# Altium PCB osc_evo.PcbDoc (part 5 of 5)
Units mm, origin at the board's own origin, x right, y up, seen from the top; angles counter-clockwise.
Board outline 145 x 85 mm, 4 copper layers (Top Layer, Mid-Layer 1, Mid-Layer 2, Bottom Layer); 114 components, 170 nets, 648 pads, 625 vias.
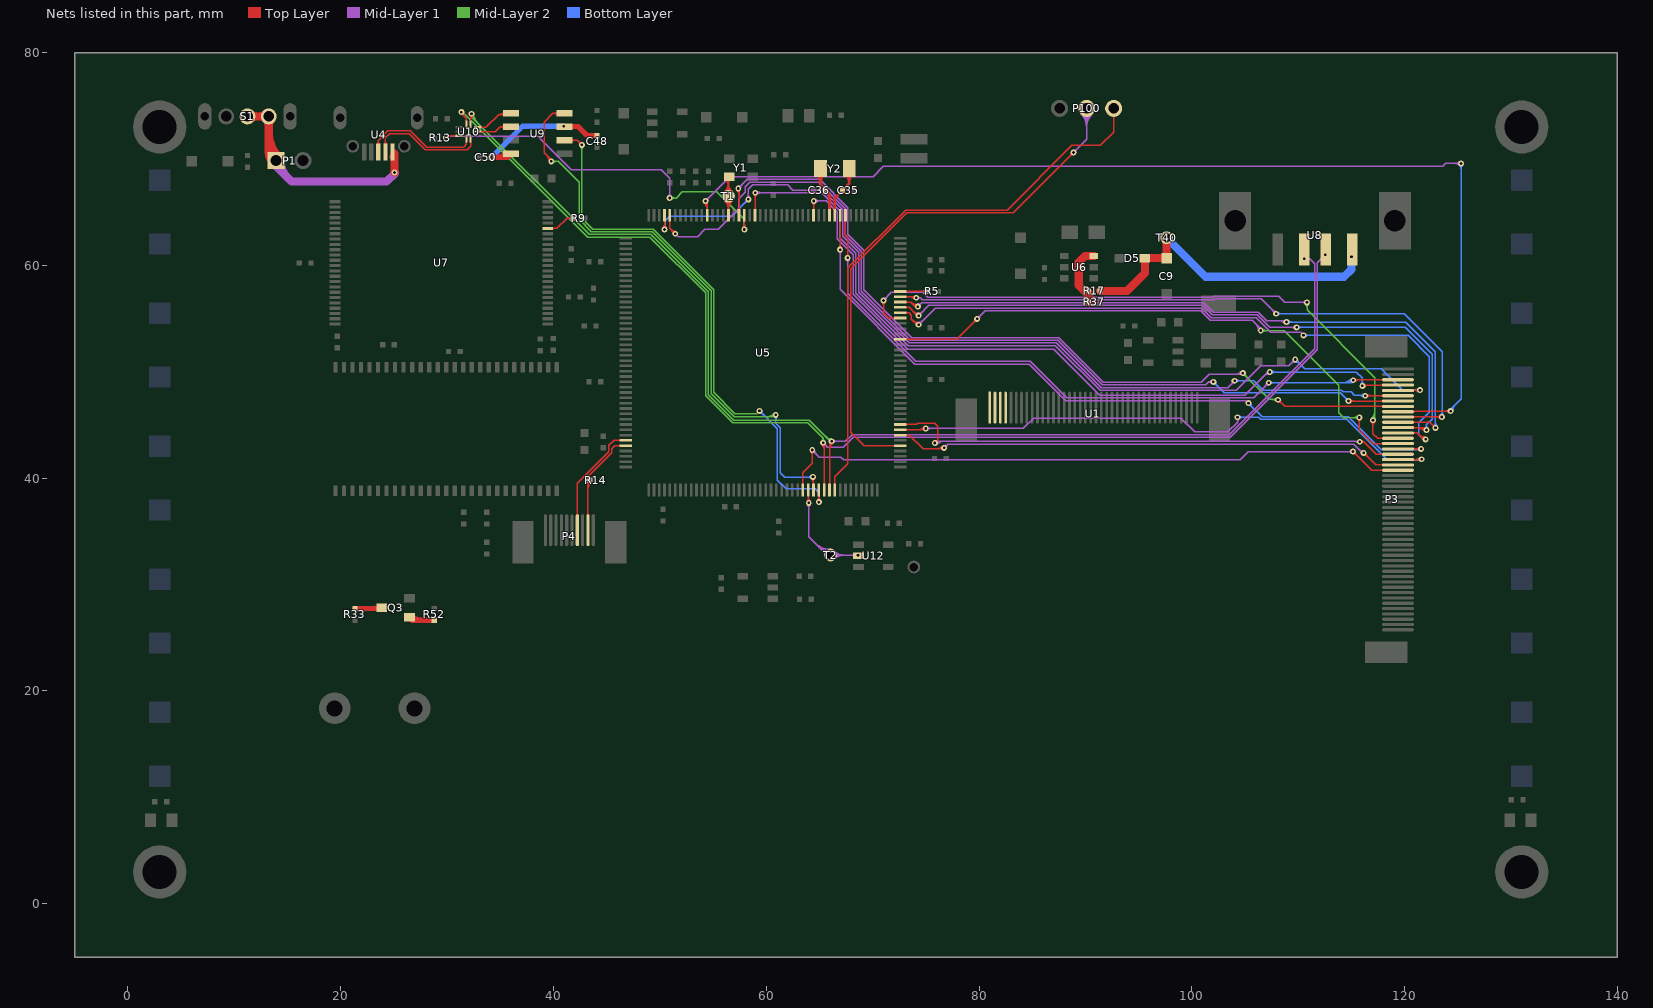
[diagram p7: the nets of this part, all layers, seen from the top]

## Via types
v1: diameter 0.55, hole 0.25, Top Layer to Bottom Layer, tented both sides, 463 vias
v2: diameter 0.55, hole 0.25, Top Layer to Bottom Layer, 156 vias
v3: diameter 0.45, hole 0.2, Top Layer to Bottom Layer, tented both sides, 4 vias
v4: diameter 1.5, hole 1.5, Top Layer to Bottom Layer, tented both sides, 2 vias

## Nets (pads, with @x,y where several pads share a name; then routed paths per layer and width w, separated by ;. In a path a pad name is that pad's centre, name@x,y a point inside that pad or via, vN(x,y) a via of type N, cw(c..) or ccw(c..) an arc to the next point about the centre after c; other vN are vias at no path point) (continued)
NetP3_31: P3.31 U5.118 | length 64.4
  Top Layer w0.127: U5.118@63.407,39.419 ccw(c63.302,39.524) 63.45,39.524 ccw(c63.598,39.524) U5.118@63.493,39.419 ; U5.118@63.45,38.9 63.45,40.525 64.325,41.4 v1(64.325,42.65) ; v1@64.175,42.5 cw(c63.814,42.139) 64.325,42.139 cw(c64.836,42.139) v1@64.475,42.5 ; v1@115.15,42.289 cw(c115.15,41.778) 115.511,42.139 cw(c115.872,42.5) v1@115.361,42.5 ; v1(115.15,42.5) 116.9,40.75 P3.31@119.375,40.75 ; P3.31@117.964,40.689 ccw(c117.816,40.541) 117.816,40.75 ccw(c117.816,40.959) P3.31@117.964,40.811
  Mid-Layer 1 w0.127: v1@64.325,42.439 cw(c64.325,41.928) 64.686,42.289 cw(c65.047,42.65) v1@64.536,42.65 ; v1(64.325,42.65) 65,41.975 67.025,41.975 67.283,41.717 104.542,41.717 105.3,42.475 115.125,42.475 v1(115.15,42.5) ; 114.579,42.475 ccw(c114.579,43.071) v1@115,42.65 ; 114.7,42.475 cw(c114.7,42.05) v1@115,42.35
NetP3_32: P3.32 U5.139 | length 52.6
  Top Layer w0.127: U5.139@72.6,44.05 73.45,44.05 74.75,42.75 v1@76.55,42.75 ; U5.139@73.118,44.007 cw(c73.223,43.902) 73.223,44.05 cw(c73.223,44.199) U5.139@73.118,44.094 ; 75.973,42.75 ccw(c75.973,43.602) v1@76.575,43 ; 76.28,42.75 ccw(c76.28,43.295) v1@76.665,42.91 ; 76.456,42.75 cw(c76.456,42.581) v1@76.575,42.7 ; v1@116.15,42.164 cw(c116.15,41.653) 116.511,42.014 cw(c116.872,42.375) v1@116.361,42.375 ; v1(116.15,42.375) 117.275,41.25 P3.32@119.375,41.25 ; P3.32@117.964,41.189 ccw(c117.816,41.041) 117.816,41.25 ccw(c117.816,41.459) P3.32@117.964,41.311
  Mid-Layer 1 w0.127: v1(76.725,42.85) 77.05,43.175 ; v1@76.741,43.061 ccw(c76.772,43.453) 77.05,43.175 ; v1@76.936,42.866 cw(c77.328,42.897) 77.05,43.175 ; 115.533,42.842 ccw(c116.15,43.459) v1@116.15,42.586 ; 115.75,42.625 ccw(c116.15,43.026) v1@116.15,42.459 ; 115.895,42.48 cw(c115.79,42.375) v1@115.939,42.375 ; v1(116.15,42.375) 116,42.375 115.2,43.175 77.05,43.175
NetP3_33: P3.33 U5.140 | length 60.4
  Top Layer w0.127: U5.140@72.6,44.55 74.875,44.55 v1(75,44.675) ; U5.140@73.118,44.507 cw(c73.223,44.402) 73.223,44.55 cw(c73.223,44.699) U5.140@73.118,44.594 ; 74.188,44.55 ccw(c74.188,45.487) v1@74.85,44.825 ; 74.494,44.55 ccw(c74.494,45.181) v1@74.94,44.735 ; P3.33@119.375,41.75 121.575,41.75 v1(121.6,41.775) ; P3.33@120.786,41.689 cw(c120.934,41.541) 120.934,41.75 cw(c120.934,41.959) P3.33@120.786,41.811 ; 121.029,41.75 ccw(c121.029,42.346) v1@121.45,41.925 ; 121.15,41.75 cw(c121.15,41.325) v1@121.45,41.625
  Mid-Layer 1 w0.127: v1(75,44.675) 84.175,44.675 85.15,45.65 98.975,45.65 100.267,44.358 103.39,44.358 104.3,45.268 ; v1@75.15,44.525 cw(c75.511,44.164) 75.511,44.675 cw(c75.511,45.186) v1@75.15,44.825 ; v1@104.163,45.564 cw(c103.913,45.268) 104.3,45.268 ; v1(104.3,45.725) 104.3,45.268 ; v1@104.437,45.564 ccw(c104.687,45.268) 104.3,45.268
  Bottom Layer w0.127: v1(104.3,45.725) 106.291,45.725 106.495,45.521 114.579,45.521 118.35,41.75 121.575,41.75 v1(121.6,41.775) ; v1@104.45,45.575 cw(c104.811,45.214) 104.811,45.725 cw(c104.811,46.236) v1@104.45,45.875 ; 121.029,41.75 ccw(c121.029,42.346) v1@121.45,41.925 ; 121.15,41.75 cw(c121.15,41.325) v1@121.45,41.625
NetP3_34: P3.34 U5.141 | length 52.9
  Top Layer w0.127: U5.141@72.6,45.05 74.16,45.05 74.25,45.141 75.859,45.141 76.125,44.875 76.125,43.55 ; U5.141@73.118,45.007 cw(c73.223,44.902) 73.223,45.05 cw(c73.223,45.199) U5.141@73.118,45.094 ; v1@75.863,43.288 76.125,43.55 ; v1@75.917,43.501 ccw(c75.981,43.694) 76.125,43.55 ; v1@76.058,43.337 cw(c76.295,43.38) 76.125,43.55 ; v1(115.781,43.427) 116.173,43.427 ; v1@115.957,43.311 cw(c116.173,43.169) 116.173,43.427 ; v1@115.957,43.543 ccw(c116.173,43.685) 116.173,43.427 ; P3.34@117.964,42.189 ccw(c117.816,42.041) 117.816,42.25 ccw(c117.816,42.459) P3.34@117.964,42.311 ; P3.34@119.375,42.25 117.35,42.25 116.173,43.427
  Mid-Layer 1 w0.127: v1@75.82,43.33 cw(c76.147,43.003) 76.147,43.466 ; v1(75.85,43.3) 76.016,43.466 115.419,43.466 115.509,43.375 115.75,43.375 115.781,43.406 v1(115.781,43.427) ; v1@75.91,43.24 cw(c76.454,42.696) 76.454,43.466 ; v1@76,43.15 cw(c76.76,42.39) 76.76,43.466
NetP3_35: P3.35 U5.8 | length 74.9
  Top Layer w0.127: v1@66.8,61.625 ccw(c66.439,61.986) 66.95,61.986 ccw(c67.461,61.986) v1@67.1,61.625 ; U5.8@66.907,64.182 cw(c66.802,64.077) 66.95,64.077 cw(c67.098,64.077) U5.8@66.993,64.182 ; v1(66.95,61.475) U5.8@66.95,64.7 ; P3.35@119.375,42.75 v1(121.55,42.75) ; P3.35@120.786,42.689 cw(c120.934,42.541) 120.934,42.75 cw(c120.934,42.959) P3.35@120.786,42.811 ; v1@121.4,42.6 ccw(c121.039,42.239) 121.039,42.75 ccw(c121.039,43.261) v1@121.4,42.9
  Mid-Layer 1 w0.127: v1@66.8,61.325 cw(c66.439,60.964) 66.95,60.964 cw(c67.461,60.964) v1@67.1,61.325 ; v1(66.95,61.475) 66.95,57.738 73.963,50.725 84.7,50.725 88.129,47.296 105.079,47.296 v1(105.325,47.05)
  Bottom Layer w0.127: v1@105.325,46.839 cw(c105.325,46.328) 105.686,46.689 cw(c106.047,47.05) v1@105.536,47.05 ; v1(105.325,47.05) 106.6,45.775 114.684,45.775 117.78,42.68 121.48,42.68 v1(121.55,42.75) ; 120.869,42.68 ccw(c120.869,43.431) v1@121.4,42.9 ; 121.176,42.68 ccw(c121.176,43.124) v1@121.49,42.81 ; 121.209,42.68 cw(c121.209,42.409) v1@121.4,42.6
NetP3_36: P3.36 U5.157 | length 61.1
  Top Layer w0.127: U5.157@72.6,53.05 77.9,53.05 v1(79.825,54.975) ; U5.157@73.118,53.007 cw(c73.223,52.902) 73.223,53.05 cw(c73.223,53.198) U5.157@73.118,53.094 ; v1@79.614,54.975 cw(c79.103,54.975) 79.464,54.614 cw(c79.825,54.253) v1@79.825,54.764 ; v1@115.6,45.55 cw(c115.239,45.189) 115.75,45.189 cw(c116.261,45.189) v1@115.9,45.55 ; v1(115.75,45.7) 115.75,44.525 117.025,43.25 P3.36@119.375,43.25 ; P3.36@117.964,43.189 ccw(c117.816,43.041) 117.816,43.25 ccw(c117.816,43.459) P3.36@117.964,43.311
  Mid-Layer 1 w0.127: v1(79.825,54.975) 80.58,55.73 100.817,55.73 101.709,54.838 105.675,54.838 106.475,54.038 v1(106.475,53.875) ; v1@79.825,55.186 ccw(c79.825,55.697) 80.186,55.336 ccw(c80.547,54.975) v1@80.036,54.975 ; 105.999,54.514 cw(c105.359,53.875) v1@106.264,53.875 ; 106.215,54.298 cw(c105.793,53.875) v1@106.391,53.875
  Mid-Layer 2 w0.127: v1(106.475,53.875) 108.7,53.875 113.825,48.75 113.825,46.15 114.275,45.7 v1(115.75,45.7) ; v1@106.625,53.725 cw(c106.986,53.364) 106.986,53.875 cw(c106.986,54.386) v1@106.625,54.025 ; v1@115.6,45.55 ccw(c115.239,45.189) 115.239,45.7 ccw(c115.239,46.211) v1@115.6,45.85
NetP3_37: P3.37 U5.161 | length 67.6
  Top Layer w0.127: v1@70.875,56.55 cw(c70.454,56.129) 71.05,56.129 ; v1(71.025,56.7) 71,56.7 71.05,56.65 71.05,55.5 71.5,55.05 U5.161@72.6,55.05 ; 71.05,56.25 cw(c71.475,56.25) v1@71.175,56.55 ; U5.161@72.082,55.007 ccw(c71.977,54.902) 71.977,55.05 ccw(c71.977,55.198) U5.161@72.082,55.094 ; v1@116.875,45.3 cw(c116.514,44.939) 117.025,44.939 cw(c117.536,44.939) v1@117.175,45.3 ; v1(117.025,45.45) 117.025,44.175 117.45,43.75 P3.37@119.375,43.75 ; P3.37@117.964,43.689 ccw(c117.816,43.541) 117.816,43.75 ccw(c117.816,43.959) P3.37@117.964,43.811
  Mid-Layer 1 w0.127: v1(71.025,56.7) 71.775,57.45 74.725,57.45 75.175,57 101.957,57 102.052,57.095 108.155,57.095 108.725,56.525 v1(110.825,56.525) ; v1@71.025,56.911 ccw(c71.025,57.422) 71.386,57.061 ccw(c71.747,56.7) v1@71.236,56.7 ; v1@110.675,56.375 ccw(c110.314,56.014) 110.314,56.525 ccw(c110.314,57.036) v1@110.675,56.675
  Mid-Layer 2 w0.127: v1@110.675,56.375 cw(c110.314,56.014) 110.825,56.014 cw(c111.336,56.014) v1@110.975,56.375 ; v1(110.825,56.525) 110.825,55.825 117.2,49.45 117.2,45.625 v1(117.025,45.45) ; v1@116.875,45.6 ccw(c116.092,46.383) 117.2,46.383 ; v1@116.965,45.51 ccw(c116.399,46.076) 117.2,46.076 ; v1@117.055,45.42 ccw(c116.705,45.77) 117.2,45.77
NetP3_38: P3.38 U5.162 | length 70.9
  Top Layer w0.127: U5.162@72.6,55.55 73.425,55.55 73.65,55.325 73.65,54.95 74.175,54.425 v1(74.325,54.425) ; U5.162@73.118,55.507 cw(c73.223,55.402) 73.223,55.55 cw(c73.223,55.698) U5.162@73.118,55.594 ; 73.708,54.892 ccw(c74.325,55.509) v1@74.325,54.636 ; 73.925,54.675 ccw(c74.325,55.076) v1@74.325,54.509 ; 74.07,54.53 cw(c73.965,54.425) v1@74.114,54.425 ; P3.38@119.375,44.25 119.4,44.275 121.15,44.275 121.775,43.65 v1(121.975,43.65) ; P3.38@120.786,44.189 cw(c120.994,43.981) 120.994,44.275 ; P3.38@120.786,44.311 ccw(c120.873,44.398) 120.873,44.275 ; 121.273,44.152 ccw(c121.975,44.855) v1@121.975,43.861 ; 121.489,43.936 ccw(c121.975,44.421) v1@121.975,43.734 ; 121.706,43.719 ccw(c121.975,43.988) v1@121.975,43.607
  Mid-Layer 1 w0.127: v1(74.325,54.425) 75.884,55.984 100.923,55.984 101.815,55.092 106.04,55.092 107.441,53.691 110.234,53.691 v1(110.5,53.425) ; v1@74.325,54.636 ccw(c74.325,55.147) 74.686,54.786 ccw(c75.047,54.425) v1@74.536,54.425
  Bottom Layer w0.127: v1(110.5,53.425) 120.325,53.425 122.321,51.429 122.321,46.196 121.325,45.2 121.325,44.075 121.75,43.65 v1(121.975,43.65) ; v1@110.65,53.275 cw(c111.011,52.914) 111.011,53.425 cw(c111.011,53.936) v1@110.65,53.575 ; 121.325,44.075 ccw(c121.858,44.608) v1@121.949,43.86 ; 121.509,43.891 ccw(c121.898,44.279) v1@121.965,43.734 ; 121.693,43.707 ccw(c121.938,43.951) v1@121.98,43.608
NetP3_39: P3.39 U5.163 | length 70.5
  Top Layer w0.127: U5.163@72.6,56.05 73.45,56.05 74.075,55.425 ; U5.163@73.118,56.007 cw(c73.223,55.902) 73.223,56.05 cw(c73.223,56.198) U5.163@73.118,56.094 ; 73.793,55.707 ccw(c74.325,56.239) v1@74.325,55.486 ; 74.01,55.49 ccw(c74.325,55.805) v1@74.325,55.359 ; 74.035,55.465 cw(c73.844,55.275) v1@74.114,55.275 ; v1@74.116,55.304 ccw(c73.974,55.324) 74.075,55.425 ; v1@74.176,55.425 cw(c74.125,55.475) 74.075,55.425 ; v1(74.325,55.275) 74.325,55.35 74.225,55.45 74.2,55.425 74.075,55.425 ; P3.39@119.375,44.75 121.825,44.75 ; P3.39@120.786,44.689 cw(c120.934,44.541) 120.934,44.75 cw(c120.934,44.959) P3.39@120.786,44.811 ; 120.996,44.75 cw(c120.996,43.471) v1@121.9,44.375 ; 121.303,44.75 cw(c121.303,43.778) v1@121.99,44.465 ; 121.609,44.75 cw(c121.609,44.084) v1@122.08,44.555 ; v1@121.854,44.605 ccw(c121.731,44.656) 121.825,44.75 ; v1@121.97,44.721 cw(c121.919,44.844) 121.825,44.75 ; v1(122.05,44.525) 121.825,44.75
  Mid-Layer 1 w0.127: v1(74.325,55.275) 75.288,56.238 101.028,56.238 101.92,55.346 106.145,55.346 107.32,54.17 109.845,54.17 v1(109.85,54.175) ; v1@74.325,55.486 ccw(c74.325,55.997) 74.686,55.636 ccw(c75.047,55.275) v1@74.536,55.275 ; 109.328,54.17 ccw(c109.328,54.697) v1@109.7,54.325 ; 109.351,54.17 cw(c109.351,53.676) v1@109.7,54.025
  Bottom Layer w0.127: v1(109.85,54.175) 120.05,54.175 122.575,51.65 122.575,45.55 122.05,45.025 ; v1@110,54.025 cw(c110.361,53.664) 110.361,54.175 cw(c110.361,54.686) v1@110,54.325 ; v1@121.903,44.677 ccw(c121.565,45.025) 122.05,45.025 ; v1(122.05,44.525) 122.05,45.025 ; v1@122.197,44.677 cw(c122.535,45.025) 122.05,45.025
NetP3_40: P3.40 U5.164 | length 69.9
  Top Layer w0.127: U5.164@72.6,56.55 73.6,56.55 ; U5.164@73.118,56.507 cw(c73.223,56.402) 73.223,56.55 cw(c73.223,56.698) U5.164@73.118,56.593 ; 73.784,56.366 ccw(c74.173,56.754) v1@74.24,56.209 ; 73.968,56.182 ccw(c74.213,56.426) v1@74.255,56.083 ; v1@74.224,56.335 cw(c74.133,57.083) 73.6,56.55 ; v1(74.25,56.125) 74.15,56.025 74.125,56.025 73.6,56.55 ; P3.40@119.375,45.25 122.375,45.25 v1(122.9,44.725) ; P3.40@120.786,45.189 cw(c120.934,45.041) 120.934,45.25 cw(c120.934,45.459) P3.40@120.786,45.311 ; v1@122.689,44.725 ccw(c122.178,44.725) 122.539,45.086 ccw(c122.9,45.447) v1@122.9,44.936
  Mid-Layer 1 w0.127: v1(74.25,56.125) 74.617,56.492 101.133,56.492 102.025,55.6 106.25,55.6 107.063,54.787 108.788,54.787 v1(108.9,54.675) ; v1@74.25,56.336 ccw(c74.25,56.847) 74.611,56.486 ccw(c74.972,56.125) v1@74.461,56.125 ; 108.118,54.787 cw(c108.118,53.893) v1@108.75,54.525 ; 108.424,54.787 cw(c108.424,54.199) v1@108.84,54.615
  Bottom Layer w0.127: v1(108.9,54.675) 120.1,54.675 122.9,51.875 v1(122.9,44.725) ; v1@109.05,54.525 cw(c109.411,54.164) 109.411,54.675 cw(c109.411,55.186) v1@109.05,54.825 ; v1@122.75,44.875 ccw(c122.389,45.236) 122.9,45.236 ccw(c123.411,45.236) v1@123.05,44.875
NetP3_41: P3.41 U5.165 | length 68.9
  Top Layer w0.127: U5.165@72.6,57.05 73.975,57.05 74.1,56.925 v1(74.1,56.95) ; U5.165@73.118,57.007 cw(c73.223,56.902) 73.223,57.05 cw(c73.223,57.198) U5.165@73.118,57.093 ; 73.348,57.05 cw(c73.348,56.198) v1@73.95,56.8 ; 73.655,57.05 cw(c73.655,56.505) v1@74.04,56.89 ; 73.831,57.05 ccw(c73.831,57.219) v1@73.95,57.1 ; P3.41@119.375,45.75 v1(123.5,45.75) ; P3.41@120.786,45.689 cw(c120.934,45.541) 120.934,45.75 cw(c120.934,45.959) P3.41@120.786,45.811 ; v1@123.35,45.6 ccw(c122.989,45.239) 122.989,45.75 ccw(c122.989,46.261) v1@123.35,45.9
  Mid-Layer 1 w0.127: v1(74.1,56.95) 74.475,56.95 ; v1@74.281,56.841 cw(c74.475,56.723) 74.475,56.95 ; v1@74.281,57.059 ccw(c74.475,57.177) 74.475,56.95 ; v1@107.714,55.45 ccw(c107.203,55.45) 107.564,55.811 ccw(c107.925,56.172) v1@107.925,55.661 ; v1(107.925,55.45) 106.534,56.841 102.157,56.841 102.063,56.746 74.679,56.746 74.475,56.95
  Bottom Layer w0.127: v1(107.925,55.45) 119.975,55.45 123.525,51.9 v1@123.525,45.775 ; v1@108.075,55.3 cw(c108.436,54.939) 108.436,55.45 cw(c108.436,55.961) v1@108.075,55.6 ; v1@123.35,45.9 ccw(c122.929,46.321) 123.525,46.321 ; 123.525,46.2 ccw(c123.95,46.2) v1@123.65,45.9
NetP3_42: P3.42 U5.33 | length 109.2
  Top Layer w0.127: v1@54.15,65.9 cw(c53.427,65.177) U5.33@54.45,65.177 ; v1@54.24,65.99 cw(c53.734,65.484) 54.45,65.484 ; v1(54.3,66.05) 54.45,65.9 U5.33@54.45,64.7 ; v1@54.33,66.08 cw(c54.04,65.79) 54.45,65.79 ; U5.33@54.407,65.218 ccw(c54.302,65.323) 54.45,65.323 ccw(c54.599,65.323) U5.33@54.494,65.218 ; P3.42@119.375,46.25 119.425,46.3 v1(124.325,46.3) ; P3.42@120.786,46.189 cw(c121.055,45.92) 121.055,46.3 ; v1@124.175,46.15 ccw(c123.814,45.789) 123.814,46.3 ccw(c123.814,46.811) v1@124.175,46.45
  Mid-Layer 1 w0.127: v1(54.3,66.05) 56.587,68.337 70.053,68.337 71.02,69.304 123.6,69.304 123.871,69.575 v1(125.3,69.575) ; v1@54.3,66.261 ccw(c54.3,66.772) 54.661,66.411 ccw(c55.022,66.05) v1@54.511,66.05 ; v1@125.15,69.425 ccw(c124.789,69.064) 124.789,69.575 ccw(c124.789,70.086) v1@125.15,69.725
  Bottom Layer w0.127: v1(124.325,46.3) 124.325,46.475 125.3,47.45 v1(125.3,69.575) ; v1@124.409,46.3 cw(c125.036,46.3) 124.593,46.743 ; v1@124.536,46.3 cw(c125.47,46.3) 124.81,46.96 ; v1@125.15,69.425 cw(c124.789,69.064) 125.3,69.064 cw(c125.811,69.064) v1@125.45,69.425
NetP3_43: P3.43 U5.27 | length 84.4
  Top Layer w0.127: v1@57.228,67.079 cw(c56.693,66.543) 57.45,66.543 ; v1@57.318,67.169 cw(c56.999,66.85) 57.45,66.85 ; v1(57.378,67.228) 57.381,67.225 v1@57.45,67.225 ; U5.27@57.407,65.218 ccw(c57.302,65.323) 57.45,65.323 ccw(c57.598,65.323) U5.27@57.494,65.218 ; U5.27@57.45,64.7 v1@57.45,67.225 ; 57.45,66.892 cw(c57.714,66.892) v1@57.527,67.079 ; v1@108.1,47.164 cw(c108.1,46.653) 108.461,47.014 cw(c108.822,47.375) v1@108.311,47.375 ; v1(108.1,47.375) 108.725,46.75 P3.43@119.375,46.75 ; P3.43@117.964,46.689 ccw(c117.816,46.541) 117.816,46.75 ccw(c117.816,46.959) P3.43@117.964,46.811 ; v1@57.45,67.225 57.45,67.25 57.475,67.225 v1@57.45,67.225
  Mid-Layer 1 w0.127: v1(57.378,67.228) 58.233,68.083 65.029,68.083 67.687,65.425 67.687,62.931 69.183,61.435 69.183,57.685 73.656,53.212 87.491,53.212 91.691,49.012 100.887,49.012 101.65,49.775 104.7,49.775 v1(104.8,49.875) ; v1@57.378,67.44 ccw(c57.378,67.95) 57.739,67.589 ccw(c58.1,67.228) v1@57.589,67.228 ; 104.048,49.775 ccw(c104.048,50.627) v1@104.65,50.025 ; 104.355,49.775 ccw(c104.355,50.32) v1@104.74,49.935 ; 104.531,49.775 cw(c104.531,49.606) v1@104.65,49.725
  Mid-Layer 2 w0.127: v1@104.8,49.664 cw(c104.8,49.153) 105.161,49.514 cw(c105.522,49.875) v1@105.011,49.875 ; v1(104.8,49.875) 107.275,47.4 v1@108.1,47.4 ; 107.529,47.4 cw(c107.529,46.804) v1@107.95,47.225 ; 107.65,47.4 ccw(c107.65,47.825) v1@107.95,47.525
NetP3_44: P3.44 U5.40 | length 89.8
  Top Layer w0.127: U5.40@50.907,64.182 cw(c50.802,64.077) 50.95,64.077 cw(c51.099,64.077) U5.40@50.994,64.182 ; U5.40@50.95,64.7 50.95,63.475 v1(51.45,62.975) ; v1@51.239,62.975 ccw(c50.728,62.975) 51.089,63.336 ccw(c51.45,63.697) v1@51.45,63.186 ; v1(114.725,47.25) P3.44@119.375,47.25 ; v1@114.875,47.1 cw(c115.236,46.739) 115.236,47.25 cw(c115.236,47.761) v1@114.875,47.4 ; P3.44@117.964,47.189 ccw(c117.816,47.041) 117.816,47.25 ccw(c117.816,47.459) P3.44@117.964,47.311
  Mid-Layer 1 w0.127: v1(51.45,62.975) 51.725,62.7 53.55,62.7 54.225,63.375 55.475,63.375 57.4,65.3 57.4,66.25 58.025,66.875 58.025,67.4 58.454,67.829 64.924,67.829 67.433,65.32 67.433,62.826 68.929,61.33 68.929,57.58 73.551,52.958 87.385,52.958 91.585,48.758 101.3,48.758 101.592,49.05 ; v1@101.858,48.92 ccw(c101.592,48.713) 101.592,49.05 ; v1@101.858,49.18 cw(c101.592,49.387) 101.592,49.05 ; v1(102.025,49.05) 101.592,49.05
  Bottom Layer w0.127: v1@102.025,48.839 cw(c102.025,48.328) 102.386,48.689 cw(c102.747,49.05) v1@102.236,49.05 ; v1(102.025,49.05) 103.05,48.025 113.95,48.025 v1(114.725,47.25) ; v1@114.514,47.25 ccw(c114.003,47.25) 114.364,47.611 ccw(c114.725,47.972) v1@114.725,47.461
NetP3_45: P3.45 U5.41 | length 93.1
  Top Layer w0.127: v1@50.3,63.525 ccw(c49.939,63.886) 50.45,63.886 ccw(c50.961,63.886) v1@50.6,63.525 ; U5.41@50.407,64.182 cw(c50.302,64.077) 50.45,64.077 cw(c50.599,64.076) U5.41@50.494,64.182 ; v1(50.45,63.375) U5.41@50.45,64.7 ; v1@58.325,65.989 cw(c58.325,65.84) 58.43,65.945 ; v1(58.325,66.2) 58.325,66.05 58.45,65.925 ; v1(116.3,47.75) P3.45@119.375,47.75 ; v1@116.45,47.6 cw(c116.811,47.239) 116.811,47.75 cw(c116.811,48.261) v1@116.45,47.9 ; P3.45@117.964,47.689 ccw(c117.816,47.541) 117.816,47.75 ccw(c117.816,47.959) P3.45@117.964,47.811
  Mid-Layer 1 w0.127: v1@58.175,66.35 ccw(c57.814,66.711) 58.325,66.711 ccw(c58.836,66.711) v1@58.475,66.35 ; v1(58.325,66.2) 58.325,67.15 58.75,67.575 62.004,67.575 62.5,67.079 65.314,67.079 67.179,65.214 67.179,62.721 68.675,61.225 68.675,57.475 73.446,52.704 87.28,52.704 91.48,48.504 103.379,48.504 v1(104.025,49.15) ; v1@103.814,49.15 cw(c103.303,49.15) 103.664,48.789 cw(c104.025,48.428) v1@104.025,48.939
  Bottom Layer w0.127: v1@50.3,63.525 ccw(c49.939,63.886) 50.45,63.886 ccw(c50.961,63.886) v1@50.6,63.525 ; v1(50.45,63.375) 50.45,64.125 50.95,64.625 56.75,64.625 v1(58.325,66.2) ; v1@58.114,66.2 cw(c57.603,66.2) 57.964,65.839 cw(c58.325,65.478) v1@58.325,65.989 ; v1(104.025,49.15) 105.825,49.15 106.696,48.279 114.055,48.279 114.234,48.1 114.975,48.1 115.275,47.8 116.25,47.8 v1(116.3,47.75) ; v1@104.175,49 cw(c104.536,48.639) 104.536,49.15 cw(c104.536,49.661) v1@104.175,49.3 ; 115.669,47.8 cw(c115.669,47.119) v1@116.15,47.6 ; 115.91,47.8 ccw(c115.91,48.14) v1@116.15,47.9 ; 115.975,47.8 cw(c115.975,47.425) v1@116.24,47.69
NetP3_46: P3.46 U5.24 | length 85.8
  Top Layer w0.127: v1@58.825,66.675 cw(c58.525,66.375) 58.95,66.375 ; U5.24@58.907,65.218 ccw(c58.802,65.323) 58.95,65.323 ccw(c59.098,65.323) U5.24@58.994,65.218 ; U5.24@58.95,64.7 58.95,66.8 v1(58.975,66.825) ; 58.95,66.254 cw(c59.546,66.254) v1@59.125,66.675 ; P3.46@119.375,48.25 119.4,48.275 v1(121.45,48.275) ; P3.46@120.786,48.189 cw(c120.994,47.981) 120.994,48.275 ; P3.46@120.786,48.311 ccw(c120.873,48.398) 120.873,48.275 ; v1@121.3,48.125 ccw(c120.939,47.764) 120.939,48.275 ccw(c120.939,48.786) v1@121.3,48.425
  Mid-Layer 1 w0.127: v1(58.975,66.825) 65.209,66.825 66.925,65.109 66.925,62.616 68.421,61.12 68.421,57.37 73.341,52.45 87.175,52.45 91.375,48.25 104.175,48.25 106.475,50.55 109.125,50.55 v1(109.725,51.15) ; v1@59.125,66.675 cw(c59.486,66.314) 59.486,66.825 cw(c59.486,67.336) v1@59.125,66.975 ; v1@109.514,51.15 cw(c109.003,51.15) 109.364,50.789 cw(c109.725,50.428) v1@109.725,50.939
  Bottom Layer w0.127: v1@109.725,50.939 cw(c109.725,50.428) 110.086,50.789 cw(c110.447,51.15) v1@109.936,51.15 ; v1(109.725,51.15) 110.6,50.275 117.8,50.275 119.8,48.275 v1(121.45,48.275) ; v1@121.3,48.125 ccw(c120.939,47.764) 120.939,48.275 ccw(c120.939,48.786) v1@121.3,48.425
NetP3_47: P3.47 U5.13 | length 75.9
  Top Layer w0.127: v1@64.325,65.9 cw(c63.964,65.539) 64.475,65.539 cw(c64.986,65.539) v1@64.625,65.9 ; U5.13@64.407,65.218 ccw(c64.241,65.384) 64.475,65.384 ; U5.13@64.45,64.7 64.475,64.725 v1(64.475,66.05) ; v1(116.025,48.675) 116.1,48.75 P3.47@119.375,48.75 ; v1@116.085,48.615 cw(c116.41,48.29) 116.41,48.75 ; v1@116.175,48.525 cw(c116.717,47.983) 116.717,48.75 ; v1@116.175,48.825 ccw(c116.355,49.005) 116.355,48.75 ; P3.47@117.964,48.689 ccw(c117.816,48.541) 117.816,48.75 ccw(c117.816,48.959) P3.47@117.964,48.811
  Mid-Layer 1 w0.127: v1(64.475,66.05) 65.625,66.05 66.671,65.004 66.671,62.511 68.167,61.015 68.167,57.265 73.307,52.125 87.025,52.125 91.346,47.804 104.954,47.804 107.175,50.025 107.225,49.975 v1(107.325,49.975) ; v1@64.625,65.9 cw(c64.986,65.539) 64.986,66.05 cw(c64.986,66.561) v1@64.625,66.2 ; 106.623,49.473 cw(c107.325,48.77) v1@107.325,49.764 ; 106.839,49.689 cw(c107.325,49.204) v1@107.325,49.891 ; 107.056,49.906 cw(c107.325,49.637) v1@107.325,50.018
  Bottom Layer w0.127: v1(107.325,49.975) 115.475,49.975 116.025,49.425 v1(116.025,48.675) ; v1@107.475,49.825 cw(c107.836,49.464) 107.836,49.975 cw(c107.836,50.486) v1@107.475,50.125 ; v1@115.875,48.825 ccw(c115.514,49.186) 116.025,49.186 ccw(c116.536,49.186) v1@116.175,48.825
NetP3_48: P3.48 U5.7 | length 71.2
  Top Layer w0.127: U5.7@67.407,64.182 cw(c67.302,64.077) 67.45,64.077 cw(c67.598,64.077) U5.7@67.493,64.182 ; U5.7@67.45,64.7 67.45,62.9 67.675,62.675 67.675,60.725 v1(67.65,60.7) ; v1@67.5,60.85 ccw(c67.079,61.271) 67.675,61.271 ; 67.675,61.15 ccw(c68.1,61.15) v1@67.8,60.85 ; v1(115.175,49.2) 115.225,49.25 P3.48@119.375,49.25 ; v1@115.235,49.14 cw(c115.5,48.875) 115.5,49.25 ; v1@115.325,49.05 cw(c115.806,48.569) 115.806,49.25 ; v1@115.325,49.35 ccw(c115.565,49.59) 115.565,49.25 ; P3.48@117.964,49.189 ccw(c117.816,49.041) 117.816,49.25 ccw(c117.816,49.459) P3.48@117.964,49.311
  Mid-Layer 1 w0.127: v1@67.5,60.55 cw(c67.079,60.129) 67.675,60.129 ; 67.675,60.25 cw(c68.1,60.25) v1@67.8,60.55 ; v1@67.675,60.725 67.675,57.372 74.068,50.979 84.805,50.979 88.234,47.55 105.8,47.55 v1(107.225,48.975) ; v1@107.014,48.975 cw(c106.503,48.975) 106.864,48.614 cw(c107.225,48.253) v1@107.225,48.764
  Bottom Layer w0.127: v1(107.225,48.975) 115.025,48.975 115.25,49.2 v1(115.175,49.2) ; v1@107.375,48.825 cw(c107.736,48.464) 107.736,48.975 cw(c107.736,49.486) v1@107.375,49.125 ; 114.121,48.975 ccw(c114.121,50.254) v1@115.025,49.35 ; 114.428,48.975 ccw(c114.428,49.947) v1@115.115,49.26 ; 114.734,48.975 ccw(c114.734,49.641) v1@115.205,49.17
NetP4_7: P4.7 U5.83 | length 11.5
  Top Layer w0.127: P4.7@42.189,36.521 ccw(c42.041,36.669) 42.25,36.669 ccw(c42.459,36.669) P4.7@42.311,36.521 ; P4.7@42.25,35.11 42.25,39.5 45.225,42.475 45.225,43.075 45.7,43.55 U5.83@46.8,43.55 ; U5.83@46.282,43.507 ccw(c46.177,43.402) 46.177,43.55 ccw(c46.177,43.699) U5.83@46.282,43.594
NetP4_9: P4.9 R14.2 U5.84 | length 12.3
  Top Layer w0.127: P4.9@43.189,36.521 ccw(c43.041,36.669) 43.25,36.669 ccw(c43.459,36.669) P4.9@43.311,36.521 ; P4.9@43.25,35.11 43.25,40.141 45.479,42.37 45.479,42.779 45.75,43.05 U5.84@46.8,43.05 ; 43.25,38.927 cw(c44.298,38.927) R14.2@43.557,39.668 ; 43.25,39.234 cw(c43.991,39.234) R14.2@43.467,39.758 ; 43.25,39.541 cw(c43.684,39.541) R14.2@43.377,39.848 ; U5.84@46.282,43.007 ccw(c46.177,42.902) 46.177,43.05 ccw(c46.177,43.199) U5.84@46.282,43.094
NetQ3_1: Q3.1 R52.2 | length 3.5
  Top Layer w0.508: Q3.1@26.475,26.925 26.75,26.65 R52.2@28.8,26.65 ; Q3.1@26.678,27.028 ccw(c27.592,27.942) 27.592,26.65
NetQ3_3: Q3.3 R33.1 | length 3
  Top Layer w0.508: R33.1@21.35,27.75 23.8,27.75 Q3.3@23.875,27.825 ; 23.241,27.75 ccw(c23.241,28.359) Q3.3@23.672,27.928
NetR5_1: R5.1 U5.166 | length 3.4
  Top Layer w0.127: U5.166@72.6,57.55 R5.1@75.075,57.55 ; U5.166@73.118,57.507 cw(c73.223,57.402) 73.223,57.55 cw(c73.223,57.698) U5.166@73.118,57.593 ; R5.1@74.943,57.418 ccw(c74.625,57.1) 74.625,57.55 ccw(c74.625,58) R5.1@74.943,57.682
NetR9_1: R9.1 U7.19 | length 3.8
  Top Layer w0.127: U7.19@39.475,63.475 40.325,63.475 41.3,64.45 41.825,64.45 R9.1@41.85,64.425 ; U7.19@39.886,63.414 cw(c40.034,63.266) 40.034,63.475 cw(c40.034,63.684) U7.19@39.886,63.536 ; 41.339,64.45 cw(c41.339,63.914) R9.1@41.718,64.293 ; 41.46,64.45 ccw(c41.46,64.815) R9.1@41.718,64.557
NetR13_2: R13.2 U5.26 U10.10 | length 40.9
  Top Layer w0.127: R13.2@29.9,71.975 29.9,71.95 v1(29.95,71.9) ; R13.2@29.963,71.913 30.225,72.175 ; R13.2@29.988,72.14 ccw(c30.082,72.318) 30.225,72.175 ; R13.2@29.994,72.107 ccw(c30.047,72.353) 30.225,72.175 ; R13.2@30.087,71.975 cw(c30.235,71.975) R13.2@30.13,72.08 ; v1@30.157,71.944 cw(c30.403,71.997) 30.225,72.175 ; U10.10@31.15,72.175 30.225,72.175 ; v1@57.8,63.525 ccw(c57.439,63.886) 57.95,63.886 ccw(c58.461,63.886) v1@58.1,63.525 ; U5.26@57.907,64.182 cw(c57.802,64.077) 57.95,64.077 cw(c58.099,64.076) U5.26@57.994,64.182 ; v1(57.95,63.375) U5.26@57.95,64.7
  Mid-Layer 1 w0.127: v1(29.95,71.9) 30.197,72.147 38.529,72.147 41.675,69 50.125,69 50.925,68.2 v1(50.925,66.325) ; v1@50.775,66.475 ccw(c50.414,66.836) 50.925,66.836 ccw(c51.436,66.836) v1@51.075,66.475
  Mid-Layer 2 w0.127: v1(50.925,66.325) 51.554,66.325 52.125,66.896 55.351,66.896 57.936,64.311 57.936,63.389 v1(57.95,63.375) ; v1@51.075,66.175 cw(c51.436,65.814) 51.436,66.325 cw(c51.436,66.836) v1@51.075,66.475 ; v1@57.8,63.525 ccw(c57.473,63.852) 57.936,63.852 ; 57.936,63.92 ccw(c58.495,63.92) v1@58.1,63.525
NetR17_1: R17.1 R37.2 U6.3 | length 8.4
  Top Layer w0.762: 89.816,57.659 ccw(c90.275,58.118) R17.1@90.275,57.469 ; R17.1@90.057,57.418 cw(c89.213,56.575) R37.2@90.406,56.575 ; R17.1@90.147,57.626 ccw(c90.608,57.533) 90.275,57.2 ; R37.2@90.275,56.575 90.275,57.2 ; R37.2@90.393,56.519 ccw(c89.85,56.775) 90.275,57.2 ; U6.3@90.8,60.875 89.95,60.875 89.375,60.3 89.375,58.1 90.275,57.2
NetT2_1: T2.1 U5.119 U12.2 | length 23.6
  Top Layer w0.127: v1@63.85,37.825 ccw(c63.61,38.065) 63.95,38.065 ; U5.119@63.907,38.382 cw(c63.802,38.277) 63.95,38.277 cw(c64.098,38.277) U5.119@63.993,38.382 ; 63.95,38 ccw(c64.325,38) v1@64.06,37.735 ; U5.119@63.95,38.306 ccw(c64.631,38.306) v1@64.15,37.825 ; U5.119@63.95,38.9 63.95,37.725 v1(64,37.675)
  Mid-Layer 1 w0.127: v1@63.85,37.525 cw(c63.489,37.164) 64,37.164 cw(c64.511,37.164) v1@64.15,37.525 ; v1(64,37.675) 64,34.5 65.725,32.775 v1@68.725,32.775 ; 64.579,33.921 ccw(c66.05,35.391) T2.1@66.05,33.311 ; 64.796,33.704 ccw(c66.05,34.958) T2.1@66.05,33.184 ; 65.013,33.487 ccw(c66.05,34.524) T2.1@66.05,33.057 ; 65.23,33.27 ccw(c66.05,34.091) T2.1@66.05,32.93 ; 65.364,33.136 cw(c65.003,32.775) T2.1@65.514,32.775 ; 65.447,33.053 ccw(c66.05,33.657) T2.1@66.05,32.803 ; T2.1@66.25,32.575 cw(c66.732,32.093) 66.732,32.775 cw(c66.732,33.457) T2.1@66.25,32.975 ; T2.1@66.34,32.485 cw(c67.039,31.786) 67.039,32.775 cw(c67.039,33.764) T2.1@66.34,33.065 ; T2.1@66.429,32.396 cw(c67.345,31.48) 67.345,32.775 cw(c67.345,34.07) T2.1@66.429,33.154 ; 68.054,32.775 cw(c68.054,32.179) v1@68.475,32.6 ; 68.175,32.775 ccw(c68.175,33.2) v1@68.475,32.9
  other v1: 68.625,32.75
NetU4_2: U4.2 U10.2 | length 11.5
  Top Layer w0.127: U4.2@24.116,71.372 ccw(c23.883,71.605) 24.213,71.605 ccw(c24.542,71.605) U4.2@24.309,71.372 ; U4.2@24.213,70.675 24.213,71.988 24.6,72.375 26.45,72.375 27.975,70.85 31.9,70.85 32.225,71.175 U10.2@32.225,71.9
NetU4_3: U4.3 U10.1 | length 11.5
  Top Layer w0.127: U4.3@23.453,71.372 ccw(c23.22,71.605) 23.55,71.605 ccw(c23.88,71.605) U4.3@23.647,71.372 ; U4.3@23.55,70.675 23.55,71.725 24.454,72.629 26.555,72.629 28.08,71.104 31.554,71.104 31.825,71.375 U10.1@31.825,71.9
NetU5_120: U5.120 U9.4 | length 63.3
  Top Layer w0.127: 39.333,70.392 cw(c38.716,69.775) v1@39.589,69.775 ; 39.55,70.175 cw(c39.149,69.775) v1@39.716,69.775 ; 39.695,70.03 ccw(c39.8,70.135) v1@39.8,69.986 ; v1@39.875,69.85 39.125,70.6 39.125,73.45 39.96,74.285 U9.4@41.025,74.285 ; U9.4@40.408,74.118 ccw(c40.004,73.714) 40.004,74.285 ccw(c40.004,74.856) U9.4@40.408,74.452 ; v1@64.25,39.975 cw(c63.889,39.614) 64.4,39.614 cw(c64.911,39.614) v1@64.55,39.975 ; 64.4,39.644 ccw(c64.719,39.644) U5.120@64.493,39.419 ; v1(64.4,40.125) 64.4,38.95 U5.120@64.45,38.9
  Mid-Layer 2 w0.127: v1(39.8,69.775) 40.475,69.775 42.421,67.829 42.421,64.32 43.579,63.162 49.279,63.162 54.821,57.62 54.821,47.947 57.018,45.75 60.7,45.75 v1(60.9,45.95) ; v1@39.95,69.625 cw(c40.311,69.264) 40.311,69.775 cw(c40.311,70.286) v1@39.95,69.925 ; 59.907,45.75 ccw(c59.907,46.943) v1@60.75,46.1 ; 60.213,45.75 ccw(c60.213,46.637) v1@60.84,46.01 ; 60.52,45.75 ccw(c60.52,46.33) v1@60.93,45.92
  Bottom Layer w0.127: v1@60.75,45.8 cw(c60.389,45.439) 60.9,45.439 cw(c61.411,45.439) v1@61.05,45.8 ; v1(60.9,45.95) 60.9,45.159 61.304,44.755 61.304,40.496 61.725,40.075 64.45,40.075 v1(64.4,40.125) ; 63.769,40.075 ccw(c63.769,40.756) v1@64.25,40.275 ; 64.01,40.075 cw(c64.01,39.735) v1@64.25,39.975 ; 64.075,40.075 ccw(c64.075,40.45) v1@64.34,40.185
NetU5_121: U5.121 U9.2 | length 57.6
  Top Layer w0.127: U9.2@41.025,71.745 42.255,71.745 v1(42.675,71.325) ; U9.2@41.642,71.578 cw(c42.046,71.174) 42.046,71.745 cw(c42.046,72.316) U9.2@41.642,71.912 ; v1@42.464,71.325 ccw(c41.953,71.325) 42.314,71.686 ccw(c42.675,72.047) v1@42.675,71.536 ; v1@64.8,37.9 ccw(c64.439,38.261) 64.95,38.261 ccw(c65.461,38.261) v1@65.1,37.9 ; U5.121@64.907,38.382 cw(c64.802,38.277) 64.95,38.277 cw(c65.099,38.277) U5.121@64.993,38.382 ; v1(64.95,37.75) U5.121@64.95,38.9
  Mid-Layer 2 w0.127: v1@42.525,71.175 cw(c42.164,70.814) 42.675,70.814 cw(c43.186,70.814) v1@42.825,71.175 ; v1(42.675,71.325) 42.675,64.425 43.684,63.416 49.384,63.416 55.075,57.725 55.075,48.053 57.053,46.075 59.125,46.075 v1(59.375,46.325)
  Bottom Layer w0.127: v1@59.375,46.114 cw(c59.375,45.603) 59.736,45.964 cw(c60.097,46.325) v1@59.586,46.325 ; v1(59.375,46.325) 61.05,44.65 61.05,39.825 61.875,39 64.6,39 64.95,38.65 v1(64.95,37.75) ; v1@64.8,37.9 ccw(c64.439,38.261) 64.95,38.261 ccw(c65.461,38.261) v1@65.1,37.9
NetU5_122: U5.122 U8.2 U10.7 | length 124.4
  Top Layer w0.127: v1@31.35,74.189 cw(c31.35,73.919) 31.54,74.11 ; v1(31.35,74.4) 31.3,74.4 31.275,74.375 31.825,73.825 U10.7@31.825,73.25 ; v1@31.434,74.4 ccw(c31.88,74.4) 31.565,74.085 ; v1@31.561,74.4 ccw(c32.314,74.4) 31.782,73.868 ; v1@65.2,43.175 cw(c64.598,42.573) 65.45,42.573 ; v1@65.29,43.265 cw(c64.905,42.88) 65.45,42.88 ; U5.122@65.407,39.419 ccw(c65.302,39.524) 65.45,39.524 ccw(c65.598,39.524) U5.122@65.493,39.419 ; U5.122@65.45,38.9 v1@65.45,43.325 ; 65.45,43.056 cw(c65.619,43.056) v1@65.5,43.175
  Mid-Layer 1 w0.127: v1@65.35,43.114 cw(c65.35,42.603) 65.711,42.964 cw(c66.072,43.325) v1@65.561,43.325 ; v1(65.35,43.325) 65.75,42.925 67.25,42.925 68.175,43.85 103.6,43.85 111.804,52.054 111.804,60.254 v1(112.55,61) ; v1@112.339,61 cw(c111.828,61) 112.189,60.639 cw(c112.55,60.278) v1@112.55,60.789
  Mid-Layer 2 w0.127: v1@31.35,74.189 cw(c31.35,73.336) 31.953,73.939 ; v1@31.35,74.316 cw(c31.35,73.769) 31.736,74.156 ; v1(31.35,74.4) 31.492,74.4 43.238,62.654 49.068,62.654 54.313,57.409 54.313,47.737 56.85,45.2 63.925,45.2 65.35,43.775 ; v1@31.561,74.4 ccw(c31.73,74.4) 31.611,74.281 ; v1@65.215,43.488 ccw(c64.977,43.775) 65.35,43.775 ; v1(65.35,43.325) 65.35,43.775 ; v1@65.485,43.488 cw(c65.723,43.775) 65.35,43.775
NetU5_123: U5.123 U8.3 U10.6 | length 124.9
  Top Layer w0.127: v1@32.15,74.1 cw(c31.97,73.92) 32.225,73.92 ; U10.6@32.225,73.25 32.225,74.175 v1(32.3,74.25) ; U10.6@32.225,73.558 cw(c32.992,73.558) v1@32.45,74.1 ; 32.225,73.865 cw(c32.685,73.865) v1@32.36,74.19 ; U5.123@65.907,39.419 ccw(c65.802,39.523) 65.95,39.523 ccw(c66.098,39.524) U5.123@65.993,39.419 ; U5.123@65.95,38.9 65.95,43.275 ; 65.95,42.482 cw(c67.143,42.482) v1@66.3,43.325 ; 65.95,42.788 cw(c66.837,42.788) v1@66.21,43.415 ; 65.95,43.095 cw(c66.53,43.095) v1@66.12,43.505 ; v1@65.964,43.374 cw(c65.891,43.334) 65.95,43.275 ; v1@66.049,43.289 ccw(c66.009,43.216) 65.95,43.275 ; v1(66.15,43.475) 65.95,43.275
  Mid-Layer 1 w0.127: v1(66.15,43.475) 67.441,43.475 68.07,44.104 103.495,44.104 111.55,52.159 111.55,60.175 111.1,60.625 v1(110.55,60.625) ; v1@66.3,43.325 cw(c66.661,42.964) 66.661,43.475 cw(c66.661,43.986) v1@66.3,43.625 ; v1@110.7,60.475 cw(c111.061,60.114) 111.061,60.625 cw(c111.061,61.136) v1@110.7,60.775
  Mid-Layer 2 w0.127: v1@32.257,74.25 ccw(c32.819,74.25) 32.422,73.853 ; v1(32.3,74.25) 32.3,73.975 43.367,62.908 49.174,62.908 54.567,57.515 54.567,47.842 56.955,45.454 64.046,45.454 66.025,43.475 v1(66.15,43.475) ; v1@32.384,74.25 ccw(c33.252,74.25) 32.639,73.636 ; v1@32.511,74.25 ccw(c33.686,74.25) 32.856,73.419 ; 65.576,43.924 ccw(c66.15,44.499) v1@66.15,43.686 ; 65.792,43.708 ccw(c66.15,44.065) v1@66.15,43.559 ; 65.877,43.623 cw(c65.73,43.475) v1@65.939,43.475
NetU9_5: U9.5 U10.5 | length 4.9
  Top Layer w0.127: U10.5@32.9,72.975 33.65,72.975 34.85,74.175 ; 35.116,74.175 ccw(c35.116,74.656) U9.5@35.49,74.354 ; 35.27,74.175 cw(c35.27,73.98) U9.5@35.408,74.118 ; U9.5@35.391,74.434 cw(c34.85,74.87) 34.85,74.175 ; U9.5@36.025,74.285 35.915,74.175 34.85,74.175
NetU9_6: U9.6 U10.4 | length 4.2
  Top Layer w0.127: U10.4@32.9,72.575 34.55,72.575 34.99,73.015 U9.6@36.025,73.015 ; U9.6@35.408,72.848 ccw(c35.004,72.444) 35.004,73.015 ccw(c35.004,73.586) U9.6@35.408,73.182
OSC-IN: T1.1 U5.29 Y1.3 | length 15.7
  Top Layer w0.127: T1.1@56.071,66.121 cw(c55.155,65.205) 56.45,65.205 cw(c57.745,65.205) T1.1@56.829,66.121 ; T1.1@56.071,66.879 ccw(c55.155,67.795) 56.45,67.795 ccw(c57.745,67.795) T1.1@56.829,66.879 ; T1.1@56.16,66.21 cw(c55.461,65.511) 56.45,65.511 ; T1.1@56.16,66.79 ccw(c55.461,67.489) 56.45,67.489 ccw(c57.439,67.489) T1.1@56.74,66.79 ; Y1.3@56.187,68.087 cw(c55.552,67.452) 56.45,67.452 ; T1.1@56.25,66.3 cw(c55.768,65.818) 56.45,65.818 cw(c57.132,65.818) T1.1@56.65,66.3 ; T1.1@56.25,66.7 ccw(c55.768,67.182) 56.45,67.182 ccw(c57.132,67.182) T1.1@56.65,66.7 ; Y1.3@56.277,68.177 cw(c55.859,67.759) 56.45,67.759 ; U5.29@56.399,65.21 ccw(c56.261,65.304) 56.426,65.335 ; U5.29@56.407,65.218 ccw(c56.302,65.323) 56.45,65.323 ccw(c56.598,65.323) U5.29@56.494,65.218 ; U5.29@56.415,65.226 ccw(c56.342,65.333) 56.469,65.309 ; 56.431,65.309 ccw(c56.558,65.333) U5.29@56.485,65.226 ; U5.29@56.45,64.7 T1.1@56.45,66.5 56.45,68.25 Y1.3@56.525,68.325 ; 56.45,65.511 cw(c57.439,65.511) T1.1@56.74,66.21 ; 56.45,67.573 cw(c57.177,67.573) Y1.3@56.663,68.087 ; 56.45,67.88 cw(c56.87,67.88) Y1.3@56.573,68.177 ; 56.474,65.335 ccw(c56.639,65.304) U5.29@56.501,65.21
TCK: P100.2 U5.137 | length 60.8
  Top Layer w0.127: U5.137@72.082,43.007 ccw(c71.977,42.902) 71.977,43.05 ccw(c71.977,43.199) U5.137@72.082,43.094 ; U5.137@72.6,43.05 69.2,43.05 67.929,44.321 67.929,59.67 73.205,64.946 83.221,64.946 v1(88.875,70.6) ; v1@88.664,70.6 cw(c88.153,70.6) 88.514,70.239 cw(c88.875,69.878) v1@88.875,70.389
  Mid-Layer 1 w0.127: v1(88.875,70.6) 90.115,71.84 P100.2@90.115,74.75 ; v1@88.875,70.811 ccw(c88.875,71.322) 89.236,70.961 ccw(c89.597,70.6) v1@89.086,70.6 ; P100.2@89.594,74.229 cw(c88.337,72.972) 90.115,72.972 cw(c91.893,72.972) P100.2@90.636,74.229 ; P100.2@89.684,74.319 cw(c88.644,73.279) 90.115,73.279 cw(c91.586,73.279) P100.2@90.546,74.319 ; P100.2@89.774,74.409 cw(c88.95,73.585) 90.115,73.585 cw(c91.28,73.585) P100.2@90.456,74.409 ; P100.2@89.864,74.499 cw(c89.257,73.892) 90.115,73.892 cw(c90.973,73.892) P100.2@90.366,74.499
TMS: P100.3 U5.124 | length 54.4
  Top Layer w0.127: U5.124@66.407,39.419 ccw(c66.302,39.524) 66.45,39.524 ccw(c66.598,39.524) U5.124@66.493,39.419 ; U5.124@66.45,38.9 66.45,40.125 67.675,41.35 67.675,59.775 73.1,65.2 82.666,65.2 88.733,71.267 91.392,71.267 92.655,72.53 P100.3@92.655,74.649 ; P100.3@92.161,74.695 P100.3@92.6,74.695
TP-XL: U1.39
TP-XR: U1.37
TP-YD: U1.38
TP-YU: U1.40
VBUS-5V: C9.1 D5.2 R17.2 T40.1 U8.1 | length 30.7
  Top Layer w0.762: R17.2@91.375,57.6 93.9,57.6 95.585,59.285 D5.2@95.585,60.675 C9.1@97.65,60.675 97.625,60.7 T40.1@97.625,62.6
  Bottom Layer w0.762: T40.1@97.625,62.6 101.3,58.925 114.3,58.925 115,59.625 v1(115,60.8)
VCC-SW: P1.1 S1.3 S1.4 U4.1 | length 30.9
  Top Layer w0.762: S1.3@11.25,74 S1.4@13.25,74 13.25,70.535 P1.1@13.935,69.85 ; S1.3@11.511,73.739 cw(c12.141,73.109) 12.141,74 cw(c12.141,74.891) S1.3@11.511,74.261 ; S1.4@12.989,74.261 cw(c12.359,74.891) 12.359,74 cw(c12.359,73.109) 12.989,73.739 cw(c12.359,73.109) 13.25,73.109 cw(c14.141,73.109) S1.4@13.511,73.739 ; 13.25,70.676 ccw(c14.761,70.676) P1.1@13.692,69.607 ; 13.25,72.515 ccw(c16.6,72.515) P1.1@14.231,70.146 ; U4.1@25.003,70.203 cw(c24.829,70.029) 25.075,70.029 ; v1(25.075,68.725) 25.075,70.521
  Mid-Layer 1 w0.762: P1.1@13.935,69.85 13.935,69.315 15.375,67.875 24.325,67.875 25.1,68.65 25.1,68.7 v1(25.075,68.725) ; P1.1@14.354,69.85 ccw(c16.657,69.85) 15.029,68.221
VDDIO: C48.1 C50.1 U9.3 U9.8 | length 14.4
  Top Layer w0.508: v1(34.175,70.15) 35.7,70.15 U9.8@36.025,70.475 ; 34.679,70.15 ccw(c34.679,71.371) U9.8@35.542,70.508 ; U9.3@41.025,73.015 41.06,73.05 42.325,73.05 43.175,72.2 C48.1@44.1,72.2
  Bottom Layer w0.508: v1(34.175,70.15) 37.1,73.075 v1(40.975,73.075)
XTAL-32-1: C35.2 U5.9 Y2.2 | length 7.7
  Top Layer w0.254: U5.9@66.45,64.7 66.45,66.325 C35.2@67.175,67.05 67.8,67.675 Y2.2@67.8,69.1 ; C35.2@67.052,67.05 cw(c66.755,67.05) 66.965,66.84 cw(c67.175,66.63) C35.2@67.175,66.927 ; C35.2@67.175,67.173 ccw(c67.175,67.47) 67.385,67.26 ccw(c67.595,67.05) C35.2@67.298,67.05 ; Y2.2@67.466,68.566 cw(c66.658,67.758) 67.8,67.758 cw(c68.942,67.758) Y2.2@68.134,68.566
XTAL-32-2: C36.2 U5.10 Y2.1 | length 7.5
  Top Layer w0.254: Y2.1@64.766,68.566 cw(c63.958,67.758) 65.1,67.758 cw(c66.242,67.758) Y2.1@65.434,68.566 ; Y2.1@65.1,69.1 65.1,67.475 C36.2@65.525,67.05 65.95,66.625 U5.10@65.95,64.7 ; C36.2@65.402,67.05 ccw(c65.105,67.05) 65.315,67.26 ccw(c65.525,67.47) C36.2@65.525,67.173 ; C36.2@65.525,66.927 cw(c65.525,66.63) 65.735,66.84 cw(c65.945,67.05) C36.2@65.648,67.05
pads on no net: P4.8 SP1.4 U1.35 U2.40 U4.4 U5.30 U5.155 U6.6 U7.1 U7.2 U7.3 U7.4 U7.5 U7.6 U7.10 U7.11 U7.14 U7.15 U7.20 U7.21 U7.22 U7.23 U7.24 U7.25 U7.26 U7.27 U7.28 U7.33 U7.34 U7.35 U7.38 U7.39 U7.40 U7.45 U7.46 U7.47 U7.48 U12.1
copper on no net:
  other v4: 109.325,65.9 113.825,65.9

## Polygon pours and split planes (outlines as drawn)
GND on Top Layer "Bottom Layer-No Net" (solid, remove dead copper, pour order 6): -2.05,77.875 133.775,77.875 137.625,74.025 137.4,73.8 137.4,-2.475 0.925,-2.475 -2.6,1.05
GND on Mid-Layer 1 "Bottom Layer-No Net" (solid, remove dead copper, pour order 8): -0.65,77.825 136.15,77.825 136.15,-1.95 136.025,-2.075 135.175,-1.225 -0.9,-1.225
GND on Mid-Layer 2 "Bottom Layer-No Net" (solid, remove dead copper, pour order 10): -2.35,78.2 137.375,78.2 137.475,78.3 137,77.825 137,-0.275 -2.35,-0.275 -2.6,-0.025
GND on Bottom Layer "Bottom Layer-No Net" (solid, remove dead copper, pour order 12): -2.85,78.425 -2,77.575 136.275,77.575 136.275,-0.5 134.7,-2.075 134.475,-1.85 -2.6,-1.85

## Keep-outs
Keep-Out Layer:
  circle w0.254: c130.875,7.85 r0.5
  circle w0.254: c3.125,7.85 r0.5
  lines w0.254: 0,3 ccw(c3,3) 3,0 33,0 33,0.5 102,0.5 102,0 131,0 ccw(c131,3) 134,3 134,73 ccw(c131,73) 131,76 119.375,76 119.375,75.5 103.775,75.5 103.775,76 3,76 ccw(c3,73) 0,73 0,3

## Other copper
Top Layer:
  rectangle net TMS: 91.75,72.475 93.525,75.625
  rectangle net TCK: 89.125,72.45 91.025,75.625
  rectangle net GND: 86.75,72.45 88.525,75.675
  rectangle net NetD3_2: 128.825,7.225 129.45,8.525
  rectangle net 3V3: 132.325,7.225 133.05,8.475
  rectangle net 3V3: 4.45,7.125 5.25,8.475
  rectangle net NetD2_2: 0.875,7.225 1.875,8.475
  pour cut-out: 75.675,75.15 75.7,75.175 75.8,75.975 79.7,76 83.375,76 83.425,75.175 84.5,70.9 83.425,66.925 83.325,66.825 83.3,66.85 75.7,66.85 75.375,71
  pour cut-out: 85,75.975 85.225,72.825 85.225,72.5 85.8,72.55 86.4,72.575 94.7,72.575 94.7,75.975 94.75,76.025
Bottom Layer:
  rectangle net GND: 127.05,5.6 128.55,7.25
  rectangle net GND: 127.05,45.775 128.55,47.425
  rectangle net GND: 127.05,57.975 128.55,59.625
  rectangle net GND: 5.45,5.6 6.95,7.25
  rectangle net GND: 5.45,45.775 6.95,47.425
  rectangle net GND: 5.45,57.975 6.95,59.625
  pour cut-out: 85,76.1 85.225,72.95 85.225,72.625 85.8,72.675 86.4,72.7 94.7,72.7 94.7,76.1 94.75,76.15

## Silkscreen, mask and mechanical layers (free items; w line width, h text height)
Top Overlay:
  rectangle: 75.725,66.825 83.475,75.175
  lines w0.2: 34,0.5 34,26 37,26 ccw(c37,27.5) 38.5,27.5 38.5,37 ; 39.5,32.5 39.5,37 ; 40.5,32.5 40.5,37 ; 41.5,32.5 41.5,37 ; 42.5,32.5 42.5,37 ; 43.5,32.5 43.5,37 ; 44.5,32.5 38.5,32.5 38.5,37 ; 49,0.5 49,26 46,26 cw(c46,27.5) 44.5,27.5 44.5,37 38.5,37 ; 52,0.5 52,26 79,26 ccw(c79,27.5) 80.5,27.5 80.5,48.5 101,48.5 101,6.85 85,6.85 ccw(c84.925,5.925) 84,6 84,0.5
  lines w0.254: 122.7,0 122.7,76
  text "TCK" at 89.475,72.175 h1.02 r270
  text "GND" at 86.675,72.125 h1.02 r270
  text "TMS" at 92.175,72.05 h1.02 r270
  text "-" at 130.05,6.15 h1.02
  text "+" at 132.5,6.125 h1.02
  text "-" at 2.075,6 h1.02
  text "+" at 4.7,5.875 h1.02
Bottom Overlay:
  lines w0.254: 0,68 32,68 32,32 11.3,32 11.3,0 ; 6.5,5.025 6.5,0 33,0 ; 6.5,7.825 6.5,45.25 ; 6.5,48 6.5,57.375 ; 6.5,60.275 6.5,76 103.775,76 ; 17,32 17,68 ; 102,0 127.5,0 127.5,5.125 ; 119.375,76 127.5,76 127.5,60.125 ; 127.5,7.75 127.5,45.375 ; 127.5,47.875 127.5,57.5 ; 10.5,7 123.5,7 123.5,73 10.5,73 10.5,7
  text "DC/AC" at 133.525,59.4 h1.02
  text "RUN" at 4.35,59.175 h1.02
  text "STOP" at 4.75,57.425 h1.02
  text "AUTO" at 4.8,46.725 h1.02
  text "CHNN" at 132.925,46.6 h1.02
  text "MEASURE" at 6.175,34.35 h0.89
  text "SWI" at 132.15,34.125 h1.02
  text "SINGLE" at 6,21.8 h1.02
  text "CAL" at 132.45,21.675 h1.02
  text "MATH" at 133.15,8.9 h1.02
  text "MENU" at 4.975,8.525 h1.02
Top Solder:
  rectangle: 128.7,7.35 129.45,8.6
  rectangle: 132.4,7.175 133.125,8.575
  rectangle: 4.4,7.025 5.375,8.575
  rectangle: 0.75,7.15 2,8.575
Bottom Solder:
  rectangle: 126.85,5.425 128.725,7.525
  rectangle: 126.8,45.575 128.675,47.675
  rectangle: 126.825,57.775 128.7,59.875
  rectangle: 5.275,5.45 7.15,7.55
  rectangle: 5.25,45.575 7.125,47.675
  rectangle: 5.25,57.775 7.125,59.875